# Altium PCB EVB_PHY_JL11x1_V1.0.0.PcbDoc
Units mil, origin at the board's own origin, x right, y up, seen from the top; angles counter-clockwise.
Board outline 6000 x 4000 mil, 4 copper layers (Top, L2, L3, Bottom), stack 35.4 mil thick; 67 components, 51 nets, 230 pads, 165 vias.
Unrouted connection lines stored in the file: 125.
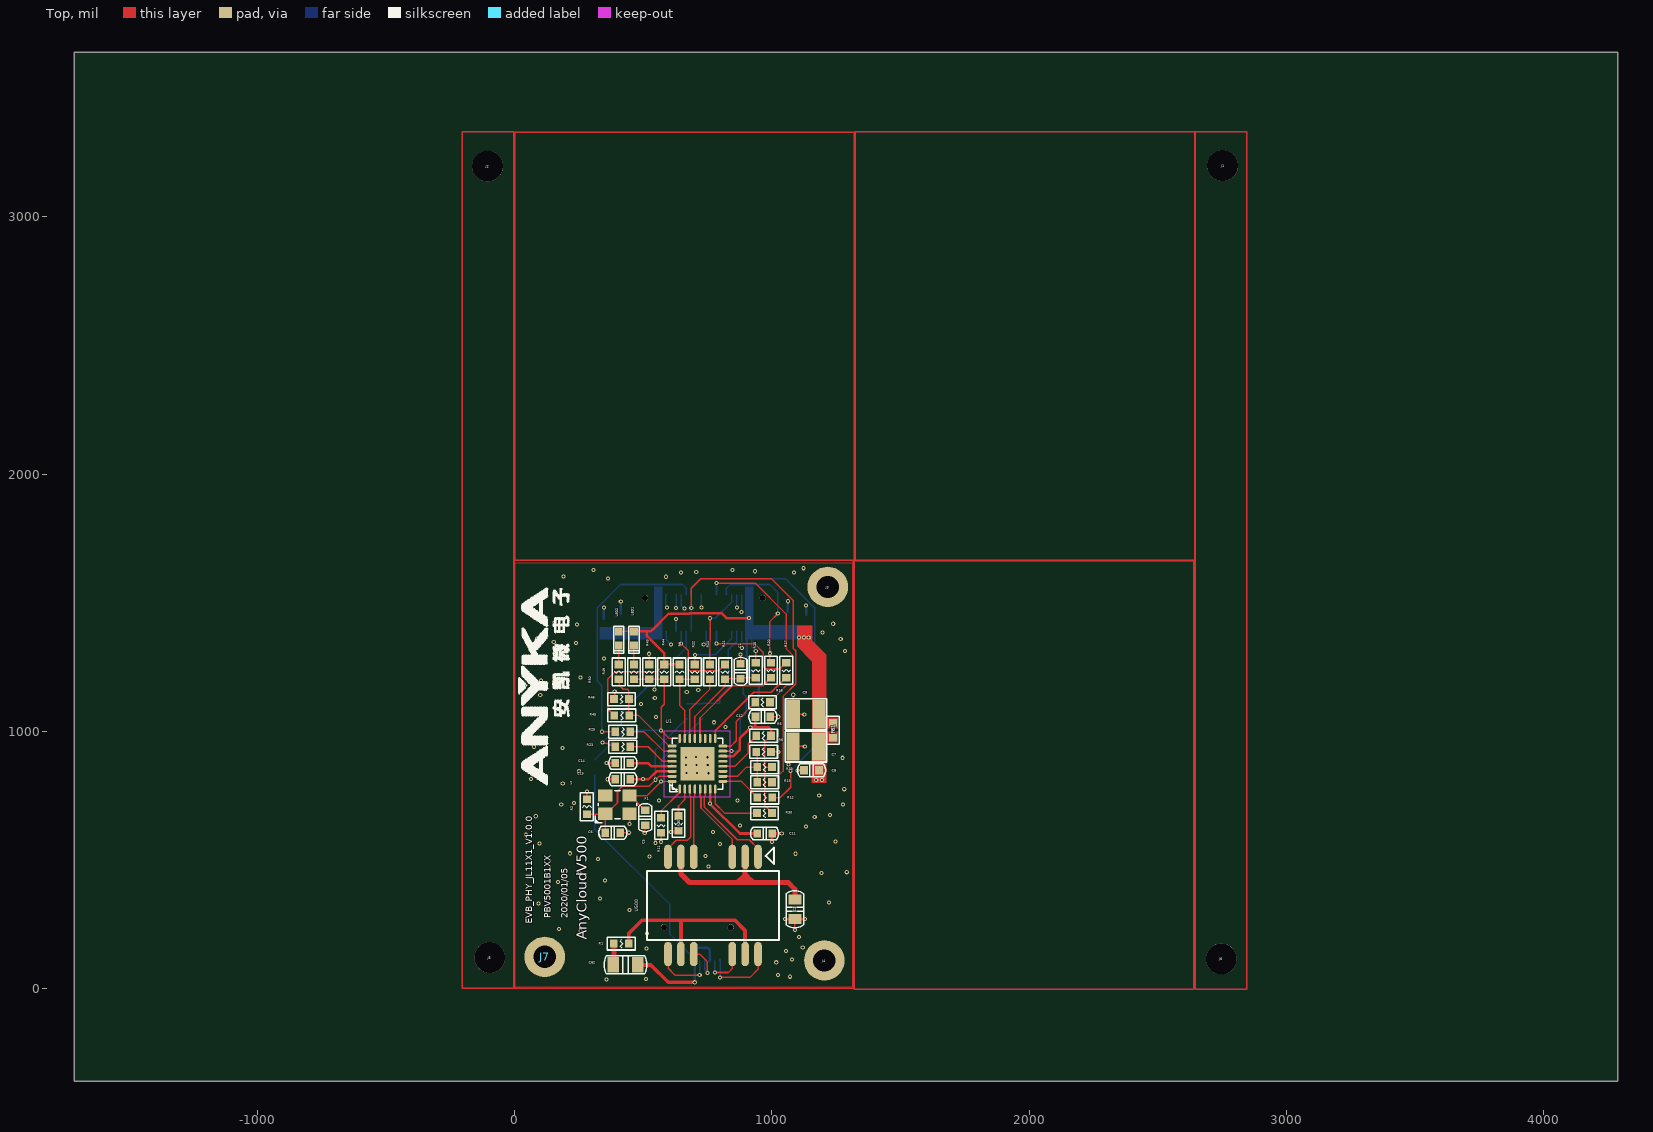
[diagram p0: Top view]
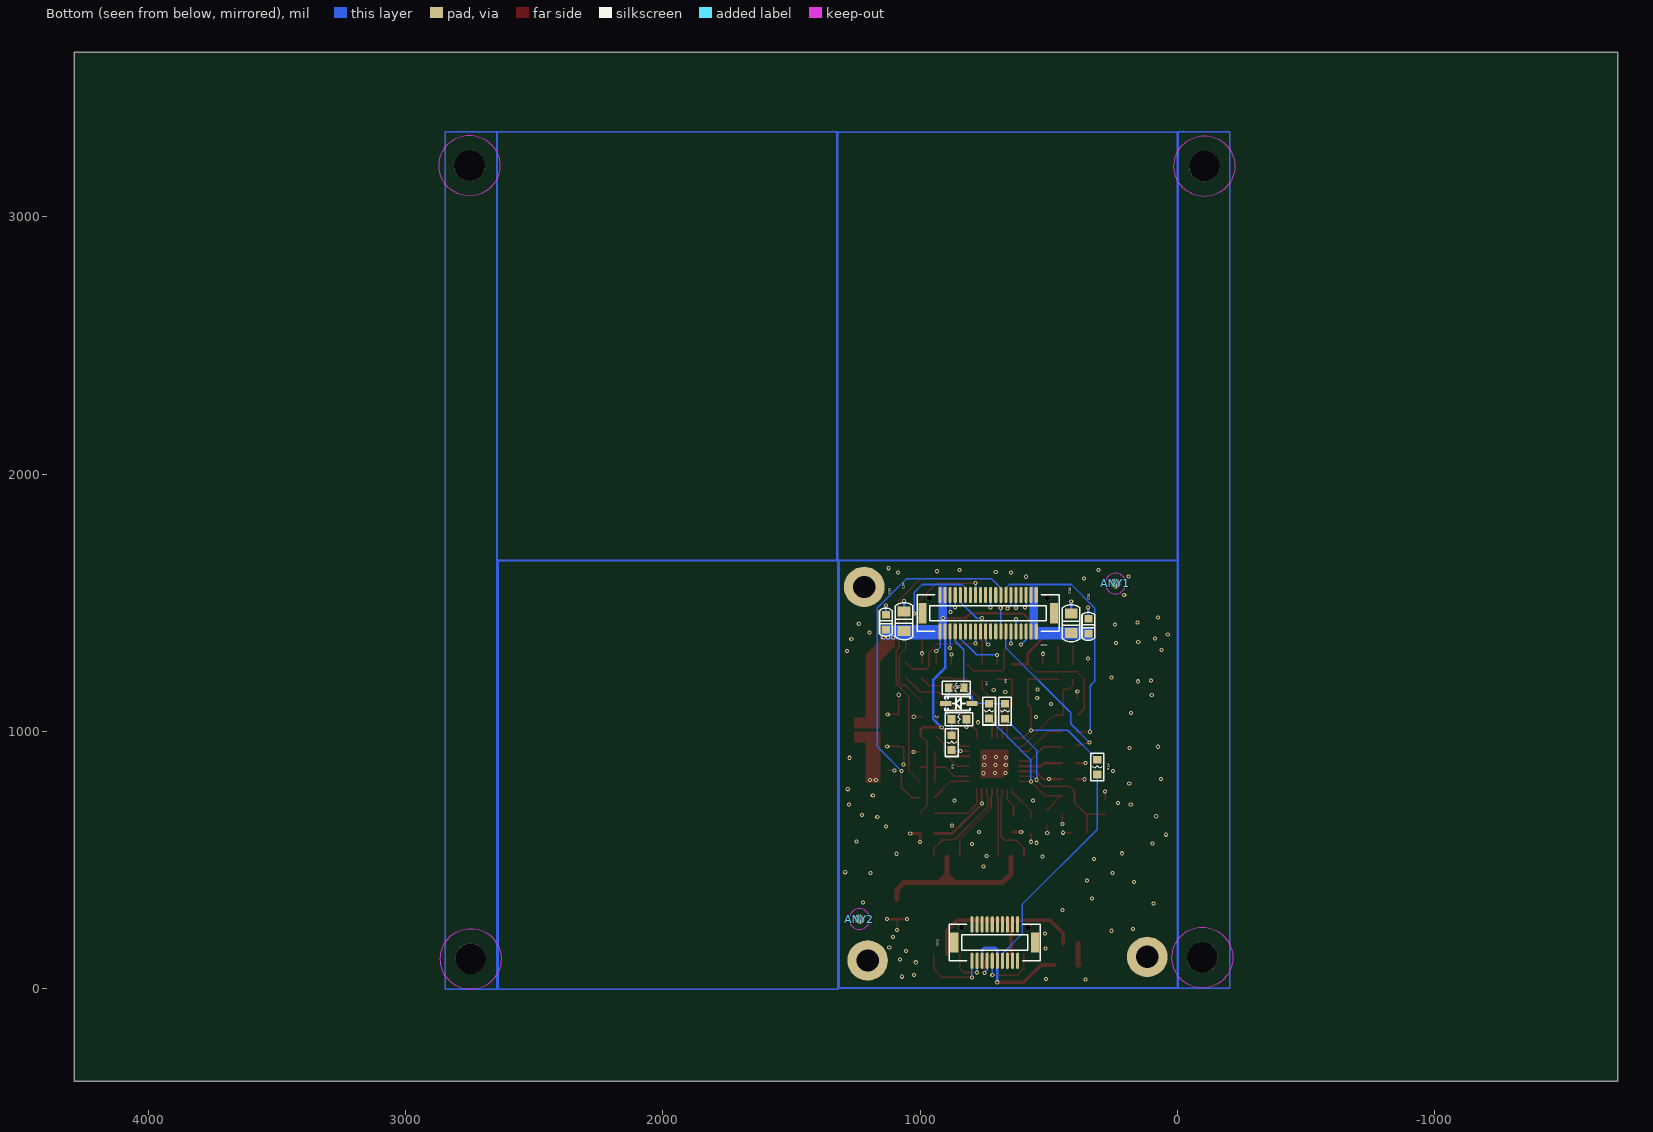
[diagram p1: Bottom view, seen from below]
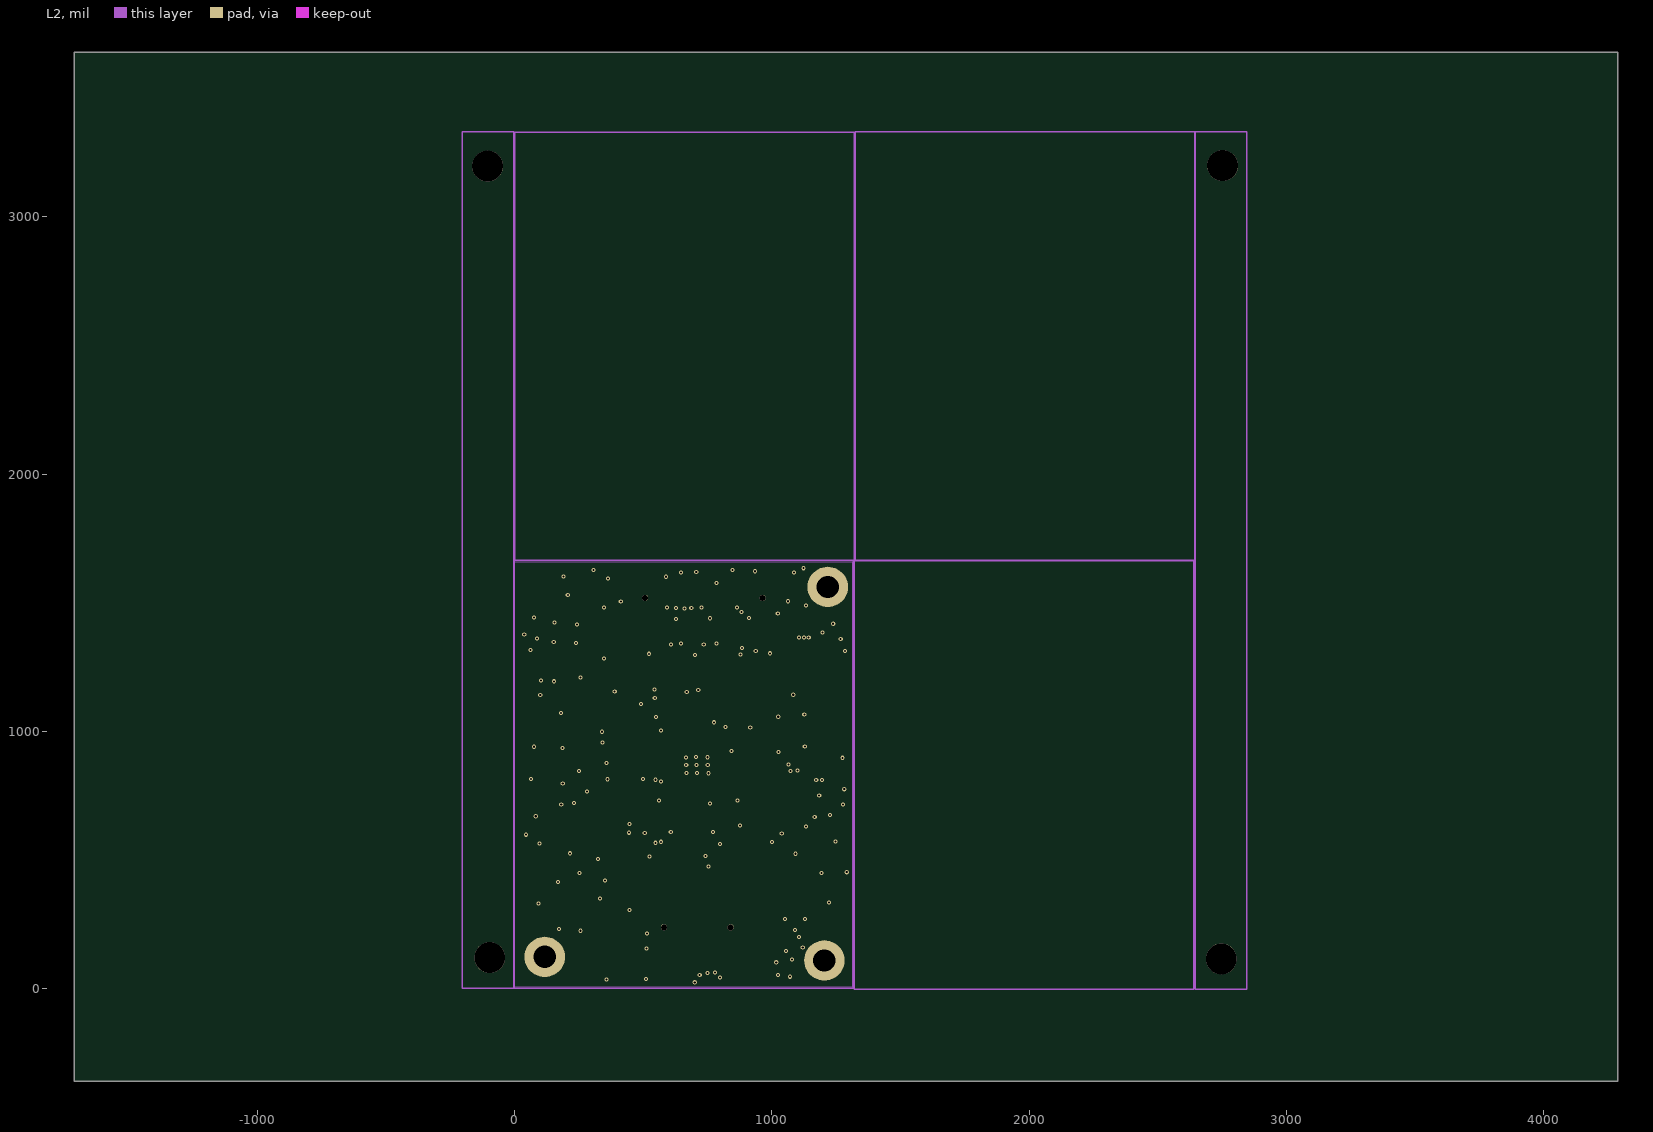
[diagram p2: L2]
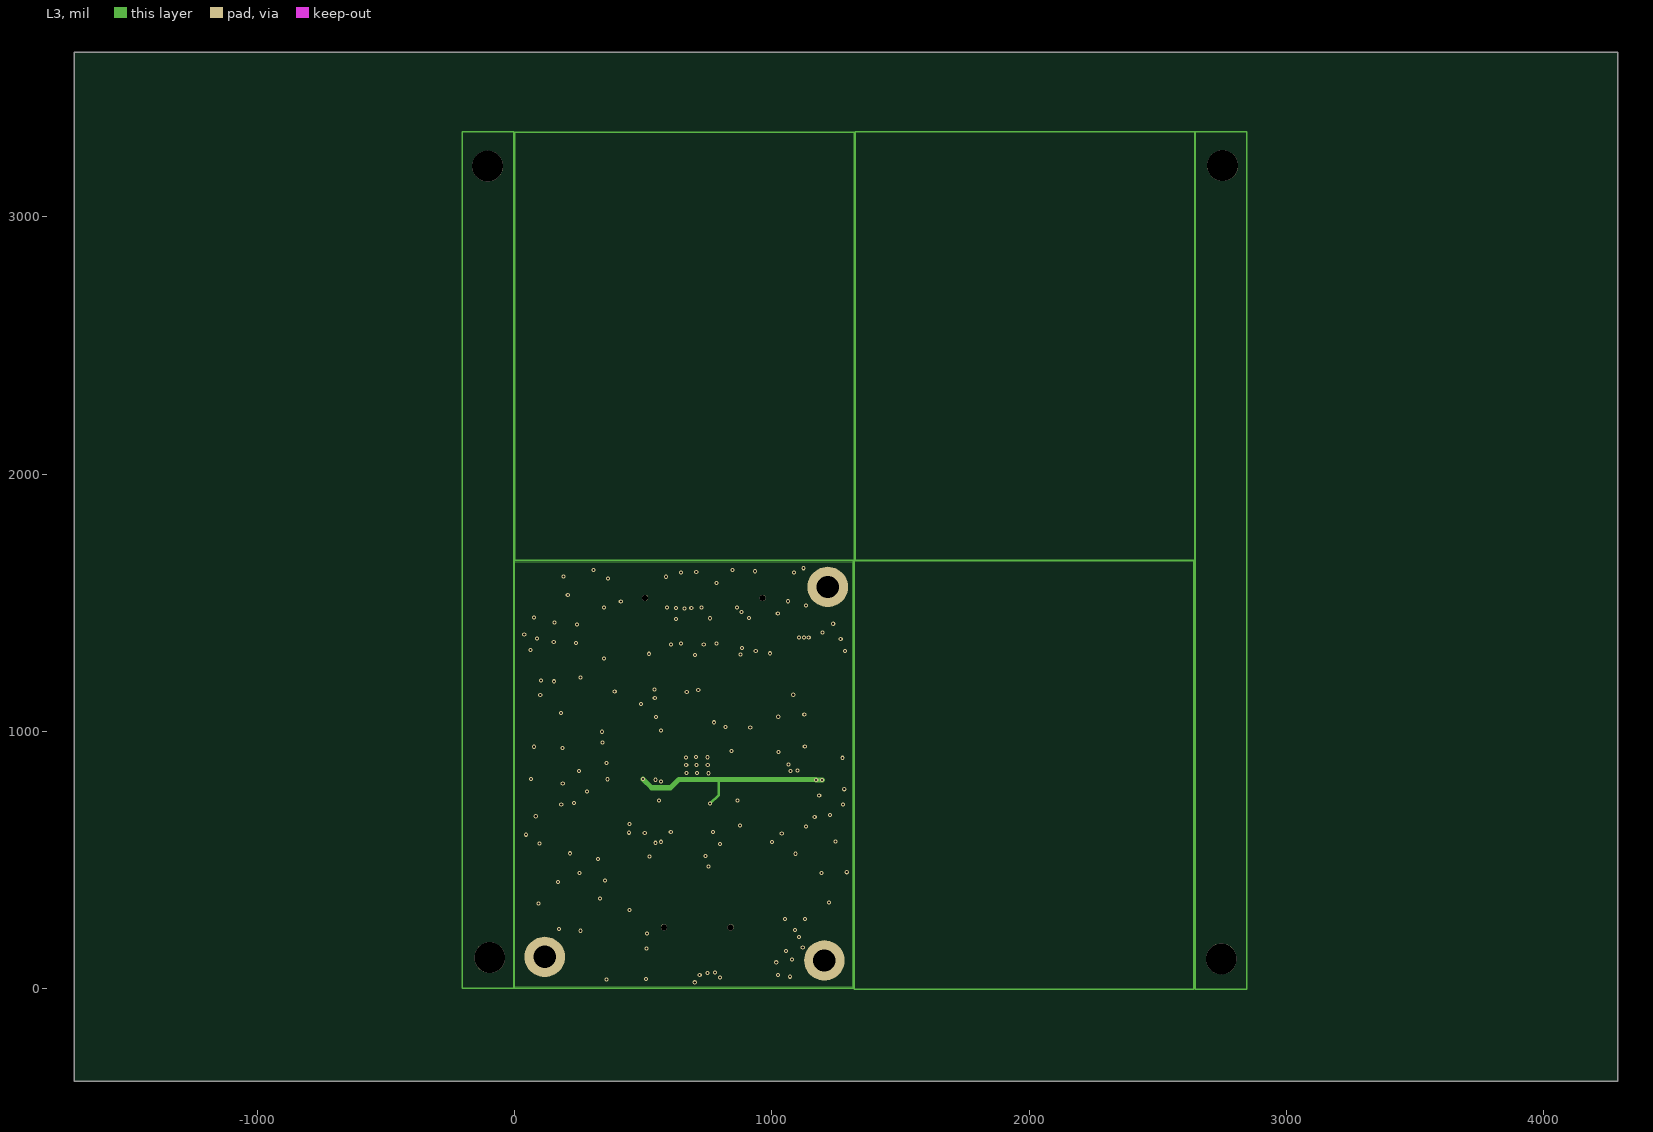
[diagram p3: L3]

## Layer stack, top to bottom
Solder Mask Top: solder mask 0.4, Solder Resist, Dk 3.5
Top: signal copper 1.35
Dielectric 1: dielectric 10, FR-4, Dk 4.3
L2: signal copper 1.35
Dielectric2: dielectric 10, FR-4, Dk 4.3
L3: signal copper 1.35
Dielectric3: dielectric 10, FR-4, Dk 4.3
Bottom: signal copper 1.35
Solder Mask Bottom: solder mask 0.4, Solder Resist, Dk 3.5

## Board outline
-1711.8,-360.1 4288.2,-360.1 4288.2,3639.9 -1711.8,3639.9

## Design rules (kind name [scope] priority, off if disabled: settings)
Clearance "Clearance - Default - DEFAULT- SMD" [IsVia vs IsSMTPin] p1: gap=6 ignorepadtopadclearanceinfootprint=FALSE
Clearance "Clearance - Default - DEFAULT - Via" [IsVia vs IsVia] p2: gap=6 ignorepadtopadclearanceinfootprint=FALSE
Clearance "Clearance - Default - DEFAULT - Net" [All] p3: gap=6 ignorepadtopadclearanceinfootprint=FALSE except(0: Arc-Hole Track-Hole SMDPad-Hole THPad-Hole Via-Hole Fill-Hole Poly-Hole Region-Hole Text-Hole; 10: Text-Text)
ComponentClearance "ComponentClearance - Default - DEFAULT" [All] p1: gap=6 collisioncheckmode=3 verticalgap=10 showdistances=FALSE
FanoutControl Fanout_Small [(CompPinCount < 5)] p3: bgadir=Out bgaviamode=Centered fanoutstyle=Auto fanoutdirection=OutThenIn viagrid=1 // Fanout_Small (Default Rule)
FanoutControl Fanout_SOIC [IsSOIC] p4: bgadir=Out bgaviamode=Centered fanoutstyle=Auto fanoutdirection=Alternating viagrid=1 // Fanout_SOIC (Default Rule)
HoleToHoleClearance "HoleToHoleClearance - Default - DEFAULT" [All] p1: gap=6 allowstackedmicrovias=TRUE
Length "Default Length" [All] p1: maxlimit=50000 minlimit=0
MaxMinImpedance "Default Impedance" [All] p1: minimum=50.00 maximum=150.0
ParallelSegment "Default Parallel Segment Adjasent" [All] p1: limit=1000 gap=200
ParallelSegment "Default Parallel Segment Same Layer" [All] p2: limit=1000 gap=200
PlaneConnect "Default PlaneConnect" [All] p1: planeconnectstyle=Direct reliefexpansion=20 reliefentries=4 reliefconductorwidth=15 reliefairgap=10
PolygonConnect "PolygonConnect - Default SMT" [IsSMTPin] p1: connectstyle=Direct reliefconductorwidth=10 reliefentries=4 polygonreliefangle="45 Angle" airgapwidth=10
PolygonConnect "PolygonConnect - Default Pad" [All] p2: connectstyle=Direct reliefconductorwidth=15 reliefentries=4 polygonreliefangle="45 Angle" airgapwidth=10
RoutingLayers "RoutingLayers - Default - DEFAULT" [All] p1: top layer_v5=TRUE mid layer 1_v5=TRUE mid layer 2_v5=TRUE bottom layer_v5=TRUE
RoutingPriority "RoutingPriority - Default - DEFAULT" [All] p1: routingpriority=3
RoutingTopology "Default Routing Topology" [All] p1: topology=Shortest
RoutingVias "RoutingVias - Default - DEFAULT" [All] p1: holewidth=8 width=16 viastyle="Through Hole" minholewidth=8 minwidth=16 maxholewidth=8 maxwidth=16
SMDToCorner "SMDToCorner - Default - DEFAULT" [All] p1: distance=60000
SolderMaskExpansion [All] p1: expansion=4 istentingtop=FALSE
Width "Default Width" [All] p1: maxlimit=6 minlimit=6 preferedwidth=6
22 further rules are at their usual default settings.

## Components (designator, comment, footprint, x,y, rotation, side; value= is the part's Value field where it differs from the comment)
ANY1 "FIDU_40" FIDU_40 240.83,1575.3 r180 bottom
ANY2 "FIDU_40" FIDU_40 1236.03,270.3 r180 bottom
C1 "C0603" C0603 878.39,1233.51 r270 top
C2 "C0805" C0805 1089.28,308.33 r270 top
C5 "C0603" C0603 508.03,664.43 r90 top
C6 "C0603" C0603 381.57,606.14 r180 top
C7 "C1210" C1210 1132.32,940.9 r180 top
C8 "C0603" C0603 1154.33,848.5 r0 top
C9 "C1210" C1210 1133.07,1066.2 r180 top
C11 "C0603" C0603 972.16,603.05 r180 top
C12 "C0603" C0603 965.13,1056.8 r180 top
C13 "C0603" C0603 420.6,813.88 r180 top
C14 "C0603" C0603 420.6,876.87 r180 top
C33 "C0603" C0603 1133.03,1424.4 r270 bottom
C34 "C0805" C0805 1062.34,1428.05 r270 bottom
C35 "C0603" C0603 345.8,1408.37 r270 bottom
C38 "C0805" C0805 412.73,1420.18 r270 bottom
C62 "C1206" C1206 431.15,92.29 r90 top
CON1 "CON20X2_0MM5_BTB_DF12" CON20X2_0MM5_BTB_DF12 735.56,1459.55 r180 bottom
CON2 "CON10X2_0MM5_BTB_DF12" CON10X2_0MM5_BTB_DF12 709.83,179 r180 bottom
D1 "GBLC03C_SOD-323_1MM4X2MM8" GBLC03C_SOD-323_1MM4X2MM8 848.99,1108.65 r0 bottom
FB1 "FB0603" FB0603 1237.43,1004.3 r270 top
J1 "SCREWING_H_3MM" SCREWING_H_3MM 2752.03,3199.3 r0 top
J2 "SCREWING_H_3MM" SCREWING_H_3MM -104.97,3197.3 r0 top
J3 "H_2MM2_4MM" H_2MM2_4MM 1217.03,1561.3 r0 top
J4 "H_2MM2_4MM" H_2MM2_4MM 1204.03,109.3 r0 top
J5 "SCREWING_H_3MM" SCREWING_H_3MM -96.97,120.3 r0 top
J6 "SCREWING_H_3MM" SCREWING_H_3MM 2747.03,115.3 r0 top
J7 "H_2MM2_4MM" H_2MM2_4MM 117.03,123.3 r0 top
LED1 "LED0603" LED0603 463.91,1361.12 r90 top
LED2 "LED0603" LED0603 404.86,1361.12 r90 top
R1 "R0603" R0603 414.63,175 r0 top
R2 "R0603" R0603 280.97,707.23 r270 top
R3 "R0603" R0603 877.56,956.29 r90 bottom
R4 "R0603" R0603 848.99,1047.29 r180 bottom
R5 "R0603" R0603 967.85,983.17 r0 top
R6 "R0603" R0603 967.85,920.18 r0 top
R7 "R0603" R0603 732.05,1078.71 r90 bottom
R8 "R0603" R0603 641.08,1231.2 r270 top
R9 "R0603" R0603 670.16,1078.54 r90 bottom
R10 "R0603" R0603 937.44,1237.45 r90 top
R11 "R0603" R0603 569.37,634.69 r90 top
R12 "R0603" R0603 972.58,742.72 r0 top
R13 "R0603" R0603 971.79,802.07 r0 top
R14 "R0603" R0603 311.78,861.16 r90 bottom
R15 "R0603" R0603 637.03,642.3 r90 top
R16 "R0603" R0603 963.91,1113.09 r0 top
R17 "R0603" R0603 1055.55,1237.45 r90 top
R18 "R0603" R0603 859.9,1169.8 r180 bottom
R20 "R0603" R0603 996.5,1237.45 r90 top
R21 "R0603" R0603 818.24,1231.2 r90 top
R22 "R0603" R0603 700.13,1231.2 r90 top
R23 "R0603" R0603 420.6,939.86 r180 top
R24 "R0603" R0603 759.19,1231.2 r90 top
R25 "R0603" R0603 420.6,998.92 r180 top
R30 "R0603" R0603 971.57,682.23 r0 top
R33 "R0603" R0603 971.79,861.12 r0 top
R43 "R0603" R0603 522.97,1231.2 r90 top
R44 "R0603" R0603 582.02,1231.2 r90 top
R45 "R0603" R0603 416.67,1061.91 r180 top
R46 "R0603" R0603 415.39,1125.45 r180 top
R49 "R0603" R0603 463.91,1231.2 r90 top
R50 "R0603" R0603 404.86,1231.2 r90 top
U1 "RTL8201F_QFN32_0MM5_5X5MM" RTL8201F_QFN32_0MM5_5X5MM 710.87,874.13 r90 top
U2 "AK2020_LOGO" AK2020_LOGO 224.03,793.3 r90 top
U500 "TRC1102NLE" TRC1102NLE 771.24,323.21 r270 top
X1 "KSX23" KSX23 399.82,714.98 r0 top

## Footprints (in the part's own frame and the unit in brackets; to place one, negate y for a bottom-side part, rotate by r counter-clockwise, add the part's x,y. Pads: shape width x height; smd on the part's side, far side on the other; paste and mask are expansions set on the pad)
AK2020_LOGO [mil]
  silkscreen extent 0,12 763,208
C0603 [mil]
  rect 30x32 smd: 1(-29,0) 2(29,0)
  silkscreen extent -55,-25 55,25
C0805 [mil]
  rect 40x50 smd: 1(-38,0) 2(38,0)
  silkscreen extent -72,-34 72,34
C1206 [mil]
  rect 60x45 smd: 1(0,47.5) 2(0,-47.5)
  silkscreen extent -35,-83 35,83
C1210 [mil]
  rect 51x110 smd: 1(-50,0) 2(50,0)
  silkscreen extent -80,-60 80,60
CON10X2_0MM5_BTB_DF12 [mm]
  oval 0.3x1.6 smd: 1(-2.25,-1.8) 2(-2.25,1.8) 3(-1.75,-1.8) 4(-1.75,1.8) 5(-1.25,-1.8) 6(-1.25,1.8) 7(-0.75,-1.8) 8(-0.75,1.8) 9(-0.25,-1.8) 10(-0.25,1.8) 11(0.25,-1.8) 12(0.25,1.8) 13(0.75,-1.8) 14(0.75,1.8) 15(1.25,-1.8) 16(1.25,1.8) 17(1.75,-1.8) 18(1.75,1.8) 19(2.25,-1.8) 20(2.25,1.8)
  rect 0.8x2 smd: 41(-4,0) 42(4,0)
  round 0.6 hole 0.6 unplated: 43(-3.3,1.5) 44(3.3,1.5)
  silkscreen extent -4.5,-1.8 4.5,1.8
CON20X2_0MM5_BTB_DF12 [mm]
  oval 0.3x1.6 smd: 1(-4.75,-1.8) 2(-4.75,1.8) 3(-4.25,-1.8) 4(-4.25,1.8) 5(-3.75,-1.8) 6(-3.75,1.8) 7(-3.25,-1.8) 8(-3.25,1.8) 9(-2.75,-1.8) 10(-2.75,1.8) 11(-2.25,-1.8) 12(-2.25,1.8) 13(-1.75,-1.8) 14(-1.75,1.8) 15(-1.25,-1.8) 16(-1.25,1.8) 17(-0.75,-1.8) 18(-0.75,1.8) 19(-0.25,-1.8) 20(-0.25,1.8) 21(0.25,-1.8) 22(0.25,1.8) 23(0.75,-1.8) 24(0.75,1.8) 25(1.25,-1.8) 26(1.25,1.8) 27(1.75,-1.8) 28(1.75,1.8) 29(2.25,-1.8) 30(2.25,1.8) 31(2.75,-1.8) 32(2.75,1.8) 33(3.25,-1.8) 34(3.25,1.8) 35(3.75,-1.8) 36(3.75,1.8) 37(4.25,-1.8) 38(4.25,1.8) 39(4.75,-1.8) 40(4.75,1.8)
  rect 0.8x2 smd: 41(-6.5,0) 42(6.5,0)
  round 0.6 hole 0.6 unplated: 43(-5.8,1.5) 44(5.8,1.5)
  silkscreen extent -7,-1.8 7,1.8
FB0603 [mil]
  rect 30x32 smd: 1(-29,0) 2(29,0)
  silkscreen extent -54,-25 54,25
FIDU_40 [mil]
  round 40 smd: 1(0,0)
  Top keep-out region: 40,0 36.96,15.31 28.28,28.28 15.31,36.96 0,40 0,40 -15.31,36.96 -28.28,28.28 -36.96,15.31 -40,0 -40,0 -36.96,-15.31 -28.28,-28.28 -15.31,-36.96 0,-40 0,-40 15.31,-36.96 28.28,-28.28 36.96,-15.31 40,0
GBLC03C_SOD-323_1MM4X2MM8 [mm]
  rect 1.1x0.5 smd: A(-1.3,0) K(1.3,0)
  silkscreen extent -1.1,-0.7 1.4,0.7
H_2MM2_4MM [mil]
  round 157.5 hole 86.6: 1(0,0)
KSX23 [mil]
  rect 55.1x47.2 smd: 1(-47.24,-35.43) 2(47.24,-35.43) 3(47.24,35.43) 4(-47.24,35.43)
  silkscreen extent -87,-71 75,55
LED0603 [mil]
  rect 30x30 smd: A(27.5,0) K(-27.5,0)
  silkscreen extent -57,-20 48,20
R0603 [mil]
  rect 30x32 smd: 1(-29,0) 2(29,0)
  silkscreen extent -54,-25 54,25
RTL8201F_QFN32_0MM5_5X5MM [mm]
  oval 0.9x0.25 smd: 1(-2.5,1.75) 2(-2.5,1.25) 3(-2.5,0.75) 4(-2.5,0.25) 5(-2.5,-0.25) 6(-2.5,-0.75) 7(-2.5,-1.25) 8(-2.5,-1.75) 17(2.5,-1.75) 18(2.5,-1.25) 19(2.5,-0.75) 20(2.5,-0.25) 21(2.5,0.25) 22(2.5,0.75) 23(2.5,1.25) 24(2.5,1.75)
  oval 0.28x0.9 smd: 9(-1.75,-2.5) 10(-1.25,-2.5) 11(-0.75,-2.5) 12(-0.25,-2.5) 13(0.25,-2.5) 14(0.75,-2.5) 15(1.25,-2.5) 16(1.75,-2.5) 25(1.75,2.5) 26(1.25,2.5) 27(0.75,2.5) 28(0.25,2.5) 29(-0.25,2.5) 30(-0.75,2.5) 31(-1.25,2.5) 32(-1.75,2.5)
  rect 3.35x3.35 smd: 33(0,0)
  Top region: -1.375,0.784 -0.784,1.375 1.375,1.375 1.375,-1.375 -1.375,-1.375 -1.375,0.784
  silkscreen extent -2.75,-2.5 2.5,2.75
SCREWING_H_3MM [mil]
  round 120 hole 120 unplated: 1(0,0)
  Bottom keep-out region: 118.11,0 109.12,45.2 83.52,83.52 45.2,109.12 0,118.11 0,118.11 -45.2,109.12 -83.52,83.52 -109.12,45.2 -118.11,0 -118.11,0 -109.12,-45.2 -83.52,-83.52 -45.2,-109.12 0,-118.11 0,-118.11 45.2,-109.12 83.52,-83.52 109.12,-45.2 118.11,0
TRC1102NLE [mm]
  oval 2.4x0.75 smd: 1(-4.8,4.445) 2(-4.8,3.175) 3(-4.8,1.905) 6(-4.8,-1.905) 7(-4.8,-3.175) 8(-4.8,-4.445) 9(4.8,-4.445) 10(4.8,-3.175) 11(4.8,-1.905) 14(4.8,1.905) 15(4.8,3.175) 16(4.8,4.445)
  silkscreen extent -5.7,-6.5 3.4,6.5

## Via types
v1: diameter 16, hole 8, Top to Bottom, 165 vias

## Nets (pads, with @x,y where several pads share a name; then routed paths per layer and width w, separated by ;. In a path a pad name is that pad's centre, name@x,y a point inside that pad or via, vN(x,y) a via of type N, cw(c..) or ccw(c..) an arc to the next point about the centre after c; other vN are vias at no path point)
3V3: C9.1 C12.2 C33.2 C34.2 CON1.1 CON1.2 CON1.3 CON1.4 FB1.1 LED1.A LED2.A R5.2 R8.1 R10.2 R30.2 R33.2 R44.2 R45.2 U1.14 | length 2433.4
  Top w6: R45.2 387.67,1062.91 362.39,1088.19 362.39,1203.47 390.13,1231.2 552.02,1231.2 581.02,1260.2 R44.2 ; LED2.A LED1.A ; R10.2 v1(937.43,1312.1) ; R5.2 996.85,976.9 972.85,963.44 972.85,861.12 ; R30.2 1000.57,683.23 972.85,710.95 972.85,861.12 ; R33.2 972.85,861.12
  Top w10: LED1.A 513.52,1388.62 ; R8.1 614.08,1260.2 613.52,1259.64 609.58,1259.64 609.02,1260.2 R44.2 582.02,1303.5 513.52,1372 513.52,1388.62 ; U1.14 850.46,903.66 875.83,929.03 875.83,973.4 907.43,1005 v1(916.03,1014.8) 899.53,996.8 919.53,1016.8 936.13,1016.8 ; v1(911.73,1440.3) 823.23,1440.3 805.53,1458.8 680.88,1458.8 679.38,1457.3 598.76,1457.3 536.31,1394.85 535.06,1394.85 528.83,1388.62 513.52,1388.62 ; C12.2@934.83,1046.16 C12.2 936.13,1016.8 ; R5.2 996.85,1007.4 987.45,1016.8 936.13,1016.8
  Bottom w6: CON1.1 922.57,1342.71 ; v1(937.43,1312.1) 922.53,1327 922.53,1342.68 ; 922.53,1342.68 922.57,1342.71
  Bottom w10: CON1.3 902.89,1246.97 949.75,1200.1 949.75,1048.52 v1(916.03,1014.8)
  other v1: 1105.13,1365 1124.43,1364.7 1143.23,1365
25M_PHY: CON1.7 D1.A R7.2 R9.2 R18.2 | length 436.4
  Bottom w6: R9.2 732.05,1107.54 R7.2 732.05,1108.65 D1.A ; D1.A@797.81,1108.28 D1.A ; CON1.7 863.52,1350.3 830.9,1317.68 R18.2 830.9,1168.8 797.81,1135.71 D1.A
$$$2269: LED1.K R49.2 | length 73.4
  Top w6: R49.2 LED1.K
$$$2751: D1.K R3.2 R4.1 R18.1 | length 198.8
  Bottom w6: R3.2 877.56,1047.29 R4.1 877.99,1048.29 899.73,1070.03 899.73,1082.09 900.17,1082.53 D1.K 900.17,1133.53 888.9,1144.8 R18.1
$$$6636: R1.2 U500.10 U500.15 | length 753.1
  Top w15: R1.2 443.63,214.1 495.33,265.8 646.24,265.8 ; U500.10 646.24,265.8 ; U500.15 896.24,226.3 856.73,265.8 646.24,265.8
$$$7002: C2.1 U500.2 U500.7 | length 757.6
  Top w20: U500.7 646.24,445.5 679.43,412.3 866.83,412.3 ; U500.2 896.24,436.8 ; C2.1 1089.28,386.46 1063.43,412.3 927.03,412.3 ; 866.83,412.3 903.13,412.3 ; 866.83,412.3 891.33,436.8 896.24,436.8 ; 896.24,436.8 902.53,436.8 927.03,412.3 ; 896.24,436.8 896.24,419.2 903.13,412.3 ; 903.13,412.3 927.03,412.3
$$$10124: R12.1 U1.9 | length 160.8
  Top w6: U1.9 882.06,805.24 943.58,743.72 R12.1
$$$10327: R20.1 U1.20 | length 420
  Top w6: U1.20 720.71,1052.02 846.29,1177.6 964.65,1177.6 995.5,1208.45 R20.1
$$$10330: R17.1 U1.17 | length 390.7
  Top w6: U1.17 779.76,1002 929.56,1151.8 997.9,1151.8 1054.55,1208.45 R17.1
$$$10331: R16.1 U1.16 | length 240.7
  Top w6: U1.16 841.09,943.03 861.55,963.49 861.55,1038.73 934.91,1112.09 R16.1
$$$10551: LED2.K R50.2 | length 73.4
  Top w6: R50.2 LED2.K
$$$10778: R11.2 U1.1 | length 142.1
  Top w6: R11.2 569.37,690.32 641.97,762.91 U1.1
$$$10835: R15.2 U1.2 | length 114.6
  Top w6: R15.2 637.03,710.3 661.65,734.92 U1.2
$$$10878: R24.1 U1.22 | length 261.9
  Top w6: U1.22 681.34,1086.43 759.19,1164.27 R24.1
$$$10879: R8.2 R22.1 U1.23 | length 297.2
  Top w6: U1.23 661.65,1080.7 641.08,1101.28 R8.2 R22.1
$$$10880: R25.1 U1.26 | length 194.1
  Top w6: R25.1 503.28,998.92 578.85,923.35 U1.26
$$$12609: C14.1 U1.29 | length 169.5
  Top w10: C14.1 518.86,876.87 531.45,864.29 U1.29 U1.29@611.4,865.34
$$$19434: C62.1 R1.1 | length 84.7
  Top w20: C62.1 385.63,92.29 R1.1
$$$27413: CON2.13 R14.1 | length 877.7
  Bottom w6: R14.1 311.78,618.46 603.53,326.71 603.53,211.97 681.04,134.46 681.04,108.14 CON2.13
AVDD33: C7.1 C8.2 C11.2 C13.1 FB1.2 U1.7 U1.30 | length 1316.6
  Top w10: C13.1 520.13,813.88 ; v1(499.53,814.1) 519.91,814.1 520.13,813.88 ; U1.30 550.86,844.61 520.13,813.88 ; U1.7 760.08,718.39 875.42,603.05 C11.2
  L3 w10: v1(759.93,719.1) 794.33,753.5 794.33,813.1
  L3 w20: v1(499.53,814.1) 532.83,780.8 606.13,780.8 638.43,813.1 794.33,813.1 1170.73,813.1 v1(1172.33,811.5) v1(1195.63,811.5)
ETH_RX+: CON2.7 U500.11 | length 160.3
  Top w6: U500.11 720,134.24 749.43,104.81 v1(749.43,61.1)
  Bottom w6: CON2.7 739.36,73.3 749.43,63.23 v1(749.43,61.1)
ETH_RX-: CON2.9 U500.9 | length 244.9
  Top w6: U500.9 597.13,133.34 597.13,79 623.83,52.3 v1(719.53,52.3)
  Bottom w6: v1(719.53,52.3) 719.68,82.55 CON2.9
ETH_TX+: CON2.1 U500.16 | length 308.2
  Top w6: v1(798.93,43.4) 914.73,43.4 946.24,74.91 U500.16
  Bottom w6: CON2.1 798.42,114.41 798.52,114.41 798.52,44.17 798.63,44.17 798.93,49.67 v1(798.93,43.4)
ETH_TX-: CON2.3 U500.14 | length 176.4
  Top w6: v1(778.53,62.6) 831.13,62.6 846.24,77.71 U500.14
  Bottom w6: v1(778.53,62.6) 778.89,62.61 778.73,82.55 CON2.3
GND: C1.1 C2.2 C5.1 C6.1 C7.2 C8.1 C9.2 C11.1 C12.1 C13.2 C14.2 C33.1 C34.1 C35.1 C38.1 CON1.5 CON1.6 CON1.8 CON1.19 CON1.22 CON1.30 CON1.31 CON1.32 CON1.35 CON1.36 J3.1 J4.1 J7.1 R2.1 R4.2 R6.2 R11.1 R15.1 R43.2 R46.2 U1.33 X1.2 X1.4 | length 1688.7
  Top w6: R2.1 v1(280.97,766.29) ; X1.4@352.58,748.78 X1.4 ; R46.2 389.03,1125.45 v1(389.03,1155.2) ; C6.1 450.84,606.14 v1(444.93,606.11) ; v1(446.75,640.6) 446.75,679.55 X1.2 ; v1(505.93,605.2) 508.03,630.4 C5.1 ; R43.2 v1@522.97,1301.57 ; v1(569.33,570.7) 569.37,570.74 R11.1 ; v1@626.03,1481.3 v1(627.03,1480.3) ; C1.1 v1(878.43,1299.1) ; C12.1 v1(1024.93,1056.8) ; R6.2 1026.33,920.18 v1(1026.33,919.8) ; v1(1065.03,871.3) 1064.03,871.3 1064.03,940.61 C7.2 1082.73,941.3 v1(1128.03,941.3) ; v1@1083.07,1142.27 C9.2 1083.18,1066.3 v1(1126.03,1066.3) ; v1(1089.23,228.5) C2.2@1089.23,270.3 ; v1(1099.03,847.3) 1099.03,848.2 C8.1
  Top w10: v1(357.61,876.87) C14.2 ; v1(361.55,813.88) C13.2 ; v1(607.03,608.3) 605.28,608.85 R15.1@639.01,608.85 ; v1(1000.43,569.2) 1000.43,603.05 C11.1 v1(1038.33,603) v1(1038.33,603) ; v1(1050.33,270.3) C2.2@1089.23,270.3 ; C2.2 v1(1129.33,270.3)
  L2 w6: v1(1128.03,941.3) v1@1128.03,942.3
  Bottom w6: CON1.35 589.03,1387.58 589.03,1356.3 v1(608.33,1337) ; v1(592.03,1481.3) 592.03,1484.2 587.93,1488.3 CON1.36 CON1.36@592.03,1530.31 ; v1(627.03,1480.3) 627.63,1480.9 627.63,1530.08 CON1.32 ; CON1.31 627.3,1436.3 v1(628.03,1436.3) ; CON1.30 646.98,1486.7 v1(660.03,1478) ; v1(725.73,1481.5) CON1.22 ; v1(735.13,1337.7) 745.41,1347.98 CON1.19 ; v1(819.03,1017.23) 818.53,1017.23 818.53,1047.29 R4.2 ; v1(864.03,1481) 863.52,1504.82 CON1.8 CON1.8@864.03,1529.9 ; v1(882.53,1464.3) 883.2,1464.97 CON1.6 ; v1(883.53,1323.9) 883.37,1323.9 883.37,1388.68 CON1.5 CON1.5@883.81,1388.68
  Bottom w10: C35.1 v1@345.8,1481.67 ; v1@345.83,1481.7 v1(346.73,1481.7) ; C38.1 v1(412.73,1505.1) ; C34.1 v1(1062.33,1505.9) ; C33.1 v1(1133.03,1489.3)
  other v1: 357.13,35.3 510.93,37.4 1071.03,46.3 1023.23,53.3 1017.03,102.3 1078.23,113 1054.33,146.5 513.03,156.3 1120.03,159.3 1106.03,201.3 514.03,214.3 256.53,224.8 172.93,232 446.33,306.1 92.43,330.6 1221.63,335.4 331.33,350.8 169.23,414.8 352.03,420.5 252.13,448.7 1193.03,450.1 1291.03,452.5 753.93,475.1 323.73,503.4 523.93,513.2 741.73,516.2 1092.53,524.2 214.53,526 798.03,561.9 97.23,564.8 547.53,566.8 1247.93,572 44.63,598.3 771.33,609.1 1132.83,630.9 875.53,634.4 1166.53,667 82.03,670 1226.43,674.8 181.13,715 1276.03,716.3 231.23,722 561.23,731.4 866.43,731.4 1184.03,751.4 1281.43,775.2 187.13,797.2 63.73,814.7 753.53,837.1 668.33,837.7 708.43,837.7 250.13,845.5 667.03,869.4 707.33,869.7 750.73,869.4 1275.03,897.3 666.53,899 749.23,899.5 705.13,900.8 185.63,935.8 75.73,940.2 775.13,1035.3 550.13,1056 179.53,1071.3 490.63,1107.1 544.93,1129.4 99.63,1141 1083.03,1142.3 669.13,1153.1 713.83,1160.6 543.83,1163.1 153.63,1194.7 102.53,1198.4 255.73,1209.9 347.43,1282.8 522.93,1301.6 1283.83,1313.1 61.13,1315.8 238.93,1343.9 152.13,1346.9 1267.63,1358.5 87.63,1360.9 37.43,1376.4 1197.03,1384.3 242.03,1415.4 1238.43,1418.3 155.23,1423.1 75.73,1443.3 206.63,1529.6 363.43,1593.9 588.13,1601.1 189.83,1602.7 646.83,1617.5 1085.43,1617.9 706.13,1620 935.03,1622.5 306.13,1627.4 846.83,1627.4 1123.03,1634.3
GND_EARTH: C62.2 CON2.5 CON2.11 | length 484.6
  Top w15: C62.2 529.34,92.29 597.13,24.5 v1(700.23,24.5)
  Bottom w10: v1(700.23,24.5) 700.13,60.9 699.99,82.55 CON2.11 699.99,150.63 708.66,159.3 750.43,159.3 759.05,150.69 CON2.5
LED0_NL: R14.2 R43.1 R44.1 R49.1 U1.24 | length 712.2
  Top w6: R49.1 R43.1 R44.1 582.02,1105.79 569.63,1093.4 v1(569.63,1003.9) 583.34,990.19 583.34,989.55 600.34,972.56 U1.24
  Bottom w6: R14.2 312.78,890.16 426.53,1003.9 v1(569.63,1003.9)
LED1_NL: R45.1 R46.1 R50.1 U1.25 | length 383.6
  Top w6: R50.1 407.23,1199.82 407.23,1178.5 421.83,1163.9 438.23,1163.9 444.39,1157.75 R46.1 444.39,1061.91 R45.1 481.36,1061.91 600.24,943.03 U1.25
MAC_MDCLK: CON1.10 R24.2 | length 318.4
  Top w6: R24.2 759.19,1353.26 759.63,1353.7 v1(759.63,1439.8)
  Bottom w6: v1(759.63,1439.8) 780.29,1439.8 844.57,1504.08 844.57,1530.42 CON1.10
MAC_MDIO: CON1.9 R22.2 | length 235.6
  Top w6: R22.2 700.63,1260.2 v1(700.63,1297.4)
  Bottom w6: v1(700.63,1297.4) 779.63,1297.4 844.57,1362.35 844.57,1388.68 CON1.9
MAC_RSTN: CON1.29 R21.2 | length 314.1
  Top w6: v1(646.93,1342.1) 675.13,1313.91 675.13,1241.47 680.4,1236.2 793.24,1236.2 817.24,1260.2 R21.2
  Bottom w6: v1(646.93,1342.1) 646.98,1363.09 CON1.29
MAC_RXD0: CON1.26 R12.2 | length 1395.4
  Top w6: R12.2 1033.03,742.88 1073.03,782.89 v1(1073.03,845.3)
  Bottom w6: CON1.26 685.6,1530.42 685.6,1556.76 722.13,1593.3 1053.08,1593.3 1167.43,1478.94 1167.43,965.3 1167.43,941.7 1148.08,922.34 ; v1(1073.03,845.3) 1072.05,846.28 1148.08,922.3
MAC_RXD1: CON1.25 R13.2 | length 1363.4
  Top w6: v1(686.83,1479.6) 686.83,1556.44 723.69,1593.3 998.98,1593.3 1082.63,1509.64 1082.63,1322.97 1092.55,1313.05 1092.55,1205.3 1092.55,1184.75 1043.38,1135.58 1043.38,845.66 1000.79,803.07 R13.2
  Bottom w6: CON1.25 686.35,1445.62 686.83,1446.1 v1(686.83,1479.6)
MAC_RXDV: CON1.28 R25.2 | length 960.2
  Top w6: v1(339.03,998.5) 391.6,998.5 R25.2 R25.2@391.6,999.92
  Bottom w6: v1(339.03,998.5) 339.03,1177 320.73,1195.3 320.73,1479.74 411.99,1571 653.08,1571 667.37,1556.71 667.37,1530.42 CON1.28
MAC_RXER: CON1.27 R23.2 | length 627.9
  Top w6: v1(341.93,956.9) 341.93,954.39 358.93,954.39 367.6,945.72 391.6,945.72 R23.2
  Bottom w6: v1(341.93,956.9) 414.83,1029.8 414.83,1072.05 666.67,1323.89 CON1.27
MAC_TXD0: CON1.16 R16.2 | length 764.3
  Top w6: v1(784.23,1576.3) 935.64,1576.3 1055.33,1456.61 1055.33,1321.85 1080.55,1296.63 1080.55,1189.72 1070.83,1180 1058.13,1180 1033.43,1155.3 1033.43,1154.62 992.91,1114.09 R16.2
  Bottom w6: v1(784.23,1576.3) 784.78,1556.01 CON1.16
MAC_TXD1: CON1.15 R17.2 | length 401.1
  Top w6: v1(784.53,1341.4) 932.18,1341.4 966.93,1306.64 966.93,1252.28 976.82,1242.4 1030.5,1242.4 1054.55,1266.45 R17.2
  Bottom w6: v1(784.53,1341.4) 784.78,1363.09 CON1.15
MAC_TXEN: CON1.12 R20.2 | length 535.9
  Top w6: R20.2 992.43,1266.45 v1(992.43,1303.5) 992.43,1427 v1(1023.03,1457.6)
  Bottom w6: CON1.12 823.39,1530.42 823.39,1556.76 837.64,1571 992.33,1571 1023.03,1540.3 v1(1023.03,1457.6)
RESET: C1.2 R10.1 R21.1 U1.21 | length 403.6
  Top w6: U1.21 701.02,1057.97 818.24,1175.19 R21.1 818.24,1204.51 C1.2 878.39,1208.45 R10.1
RX+_NL: U1.4 U500.6 | length 266.1
  Top w6: U500.6 697.18,512.19 697.18,745.06 701.02,748.9 U1.4
RX-_NL: U1.3 U500.8 | length 327.4
  Top w6: U500.8 596.24,544.67 628.17,576.6 671.63,576.6 685.18,590.15 685.18,745.06 681.34,748.9 U1.3
RXD1_NL: R6.1 R13.1 R33.1 U1.10 | length 270.5
  Top w6: U1.10 865.49,824.92 901.69,861.12 R33.1 ; R6.1 942.79,920.18 R33.1 ; R13.1 R33.1
RXD3_NL: R5.1 U1.12 | length 200.4
  Top w6: U1.12 856.84,864.29 908.18,915.63 908.18,951.5 938.85,982.17 R5.1
RXDV: R30.1 U1.8 | length 235
  Top w6: U1.8 779.76,718.5 816.03,682.23 R30.1
RXER_NL: R23.1 U1.28 | length 186
  Top w6: R23.1 519.03,939.86 574.92,883.98 U1.28
TX+_NL: U1.6 U500.1 | length 379.7
  Top w6: U1.6 740.39,748.9 736.55,745.06 736.55,707.07 865.12,578.5 912.41,578.5 946.24,544.67 U500.1
TX-_NL: U1.5 U500.3 | length 316
  Top w6: U1.5 720.71,748.9 724.55,745.06 724.55,702.1 846.59,580.06 846.59,512.19 U500.3
TXC: R3.1 U1.15 | length 72.5
  Top w6: U1.15 810.23,923.35 v1(842.53,923.1)
  Bottom w6: v1(842.53,923.1) 877.56,923.1 R3.1
WIFI_3V3: C35.2 C38.2 CON1.37 CON1.38 CON1.39 CON1.40
XI_NL: C5.2 R7.1 U1.32 X1.3 | length 586
  Top w6: C5.2 506.56,693.43 451.83,750.41 X1.3 515.14,750.41 v1(569.53,804.8) 600.24,805.24 U1.32
  Bottom w6: v1(569.53,804.8) 569.53,888.19 731.05,1049.71 R7.1
XO_NL: C6.2 R2.2 R9.1 U1.31 X1.1 | length 781.3
  Top w6: R2.2 352.58,678.23 X1.1 ; C6.2 X1.1 ; U1.31 560.35,824.92 v1(547.43,812) 521.33,785.9 418.68,785.9 399.83,767.06 399.83,722.85 356.53,679.55 X1.1
  Bottom w6: v1(547.43,812) 547.43,927.81 669.16,1049.54 R9.1
pads on no net: ANY1.1 ANY2.1 CON1.11 CON1.13 CON1.14 CON1.17 CON1.18 CON1.20 CON1.21 CON1.23 CON1.24 CON1.33 CON1.34 CON1.41 CON1.42 CON1.43 CON1.44 CON2.2 CON2.4 CON2.6 CON2.8 CON2.10 CON2.12 CON2.14 CON2.15 CON2.16 CON2.17 CON2.18 CON2.19 CON2.20 CON2.41 CON2.42 CON2.43 CON2.44 J1.1 J2.1 J5.1 J6.1 U1.11 U1.13 U1.18 U1.19 U1.27

## Polygon pours and split planes (outlines as drawn)
GND on L2 "L2-GND" (solid, remove dead copper, pour order 0): 1.03,1660.3 1313.03,1660.3 1313.03,5.3 1.03,5.3
GND on Bottom "Bottom-GND" (solid, remove dead copper, pour order 1): 1.03,1661.3 1314.03,1661.3 1314.03,4.3 1.03,4.3
GND on Top "Top-GND" (solid, remove dead copper, pour order 2): 2.03,1656.3 1312.03,1656.3 1312.03,5.3 2.03,5.3
GND on L3 "L3-GND" (solid, remove dead copper, pour order 3): 1.03,1660.3 1314.03,1660.3 1314.03,4.3 1.03,4.3

## Keep-outs
Top:
  region: 837.63,1000.8 579.63,1000.8 579.63,745.8 837.63,745.8 837.63,1000.8

## Other copper
Top:
  pour cut-out: 1215.03,1055.3 1259.03,1055.3 1259.03,953.3 1215.03,953.3 1215.03,1055.3
  region net AVDD33: 1155.03,998.3 1155.03,800.3 1212.03,800.3 1212.03,958.3 1256.03,958.3 1256.03,998.3 1155.03,998.3
  region net 3V3: 1157.03,1011.3 1157.03,1271.3 1098.03,1330.3 1098.03,1411.3 1157.03,1411.3 1157.03,1352.3 1210.53,1298.8 1210.53,1052.3 1257.03,1052.3 1257.03,1011.3 1157.03,1011.3
L2:
  pour cut-out: 1213.03,1057.3 1259.03,1057.3 1259.03,953.3 1213.03,953.3 1213.03,1057.3
L3:
  pour cut-out: 1214.03,1054.3 1259.03,1054.3 1259.03,953.3 1214.03,953.3 1214.03,1054.3
Bottom:
  region net 3V3: 896.98,1561.91 896.98,1357.19 1152.89,1357.19 1152.89,1412.31 928.48,1412.31 928.48,1561.91 896.98,1561.91
  region net WIFI_3V3: 330.05,1404.43 542.65,1404.43 542.65,1561.91 574.15,1561.91 574.15,1357.19 330.05,1357.19 330.05,1404.43
  pour cut-out: 1215.03,1058.3 1259.03,1058.3 1259.03,953.3 1215.03,953.3 1215.03,1058.3
Multi-Layer:
  lines w5: -202.97,2.3 -202.97,3330.3 -2.97,3330.3 -2.97,2.3 -202.97,2.3 ; -1.97,0.8 -1.97,1665.8 1317.03,1665.8 1317.03,0.8 -1.97,0.8 ; 1.03,1664.3 1.03,3329.3 1320.03,3329.3 1320.03,1664.3 1.03,1664.3 ; 1321.03,-1.7 1321.03,1663.3 2640.03,1663.3 2640.03,-1.7 1321.03,-1.7 ; 1325.03,1665.3 1325.03,3330.3 2644.03,3330.3 2644.03,1665.3 1325.03,1665.3 ; 2646.03,-1.7 2646.03,3330.3 2846.03,3330.3 2846.03,-1.7 2646.03,-1.7
  text "_ _ _ V_CUT" at -8.97,3338.3 h40 r90
  text "_ _ _ V_CUT" at 1310.03,3338.3 h40 r90
  text "_ _ _ V_CUT" at 2634.03,3338.3 h40 r90
  text "_ _ _ V_CUT" at 1327.03,-5.7 h40 r270
  text "_ _ _ V_CUT" at 6.03,-7.7 h40 r270
  text "_ _ _ V_CUT" at 2652.03,-14.7 h40 r270

## Silkscreen, mask and mechanical layers (free items; w line width, h text height)
Silkscreen Top:
  text "PBV5001B1XX" at 141.03,274.3 h25 r90
  text "2020/01/05" at 207.03,274.3 h25 r90
  text "EVB_PHY_JL11X1_V1.0.0" at 69.03,252.3 h25 r90
  text "AnyCloudV500" at 280.03,189.3 h40 r90